# Altium PCB PCB1.PcbDoc
Units mil, origin at the board's own origin, x right, y up, seen from the top; angles counter-clockwise.
Board outline 3000 x 3150 mil, 4 copper layers (Top Layer 1, Power, Ground, Bottom Layer 1), stack 23.712 mil thick; 35 components, 32 nets, 142 pads, 10 vias.
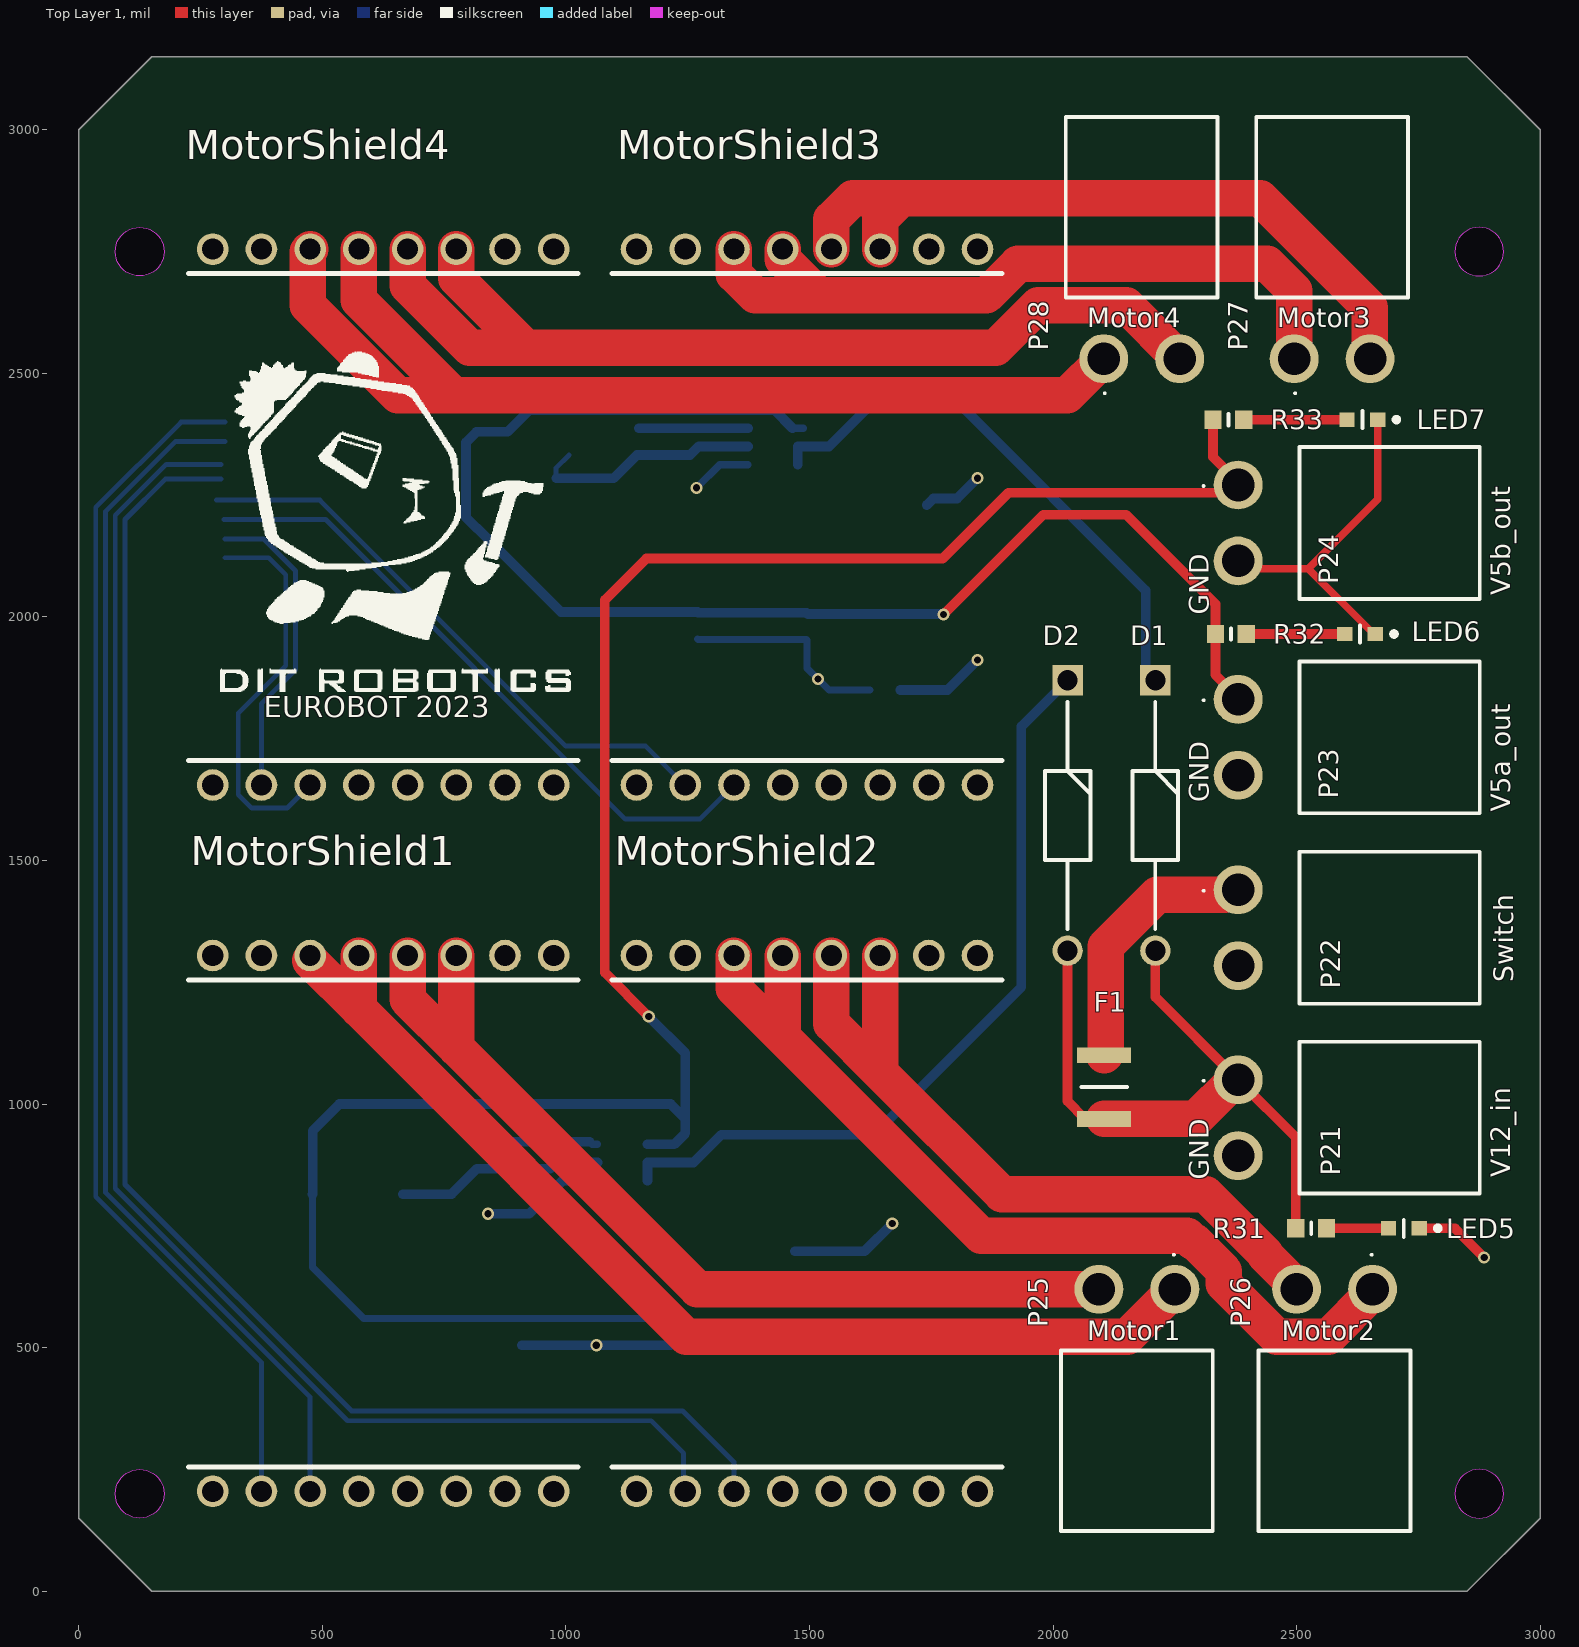
[diagram p0: Top Layer 1 view]
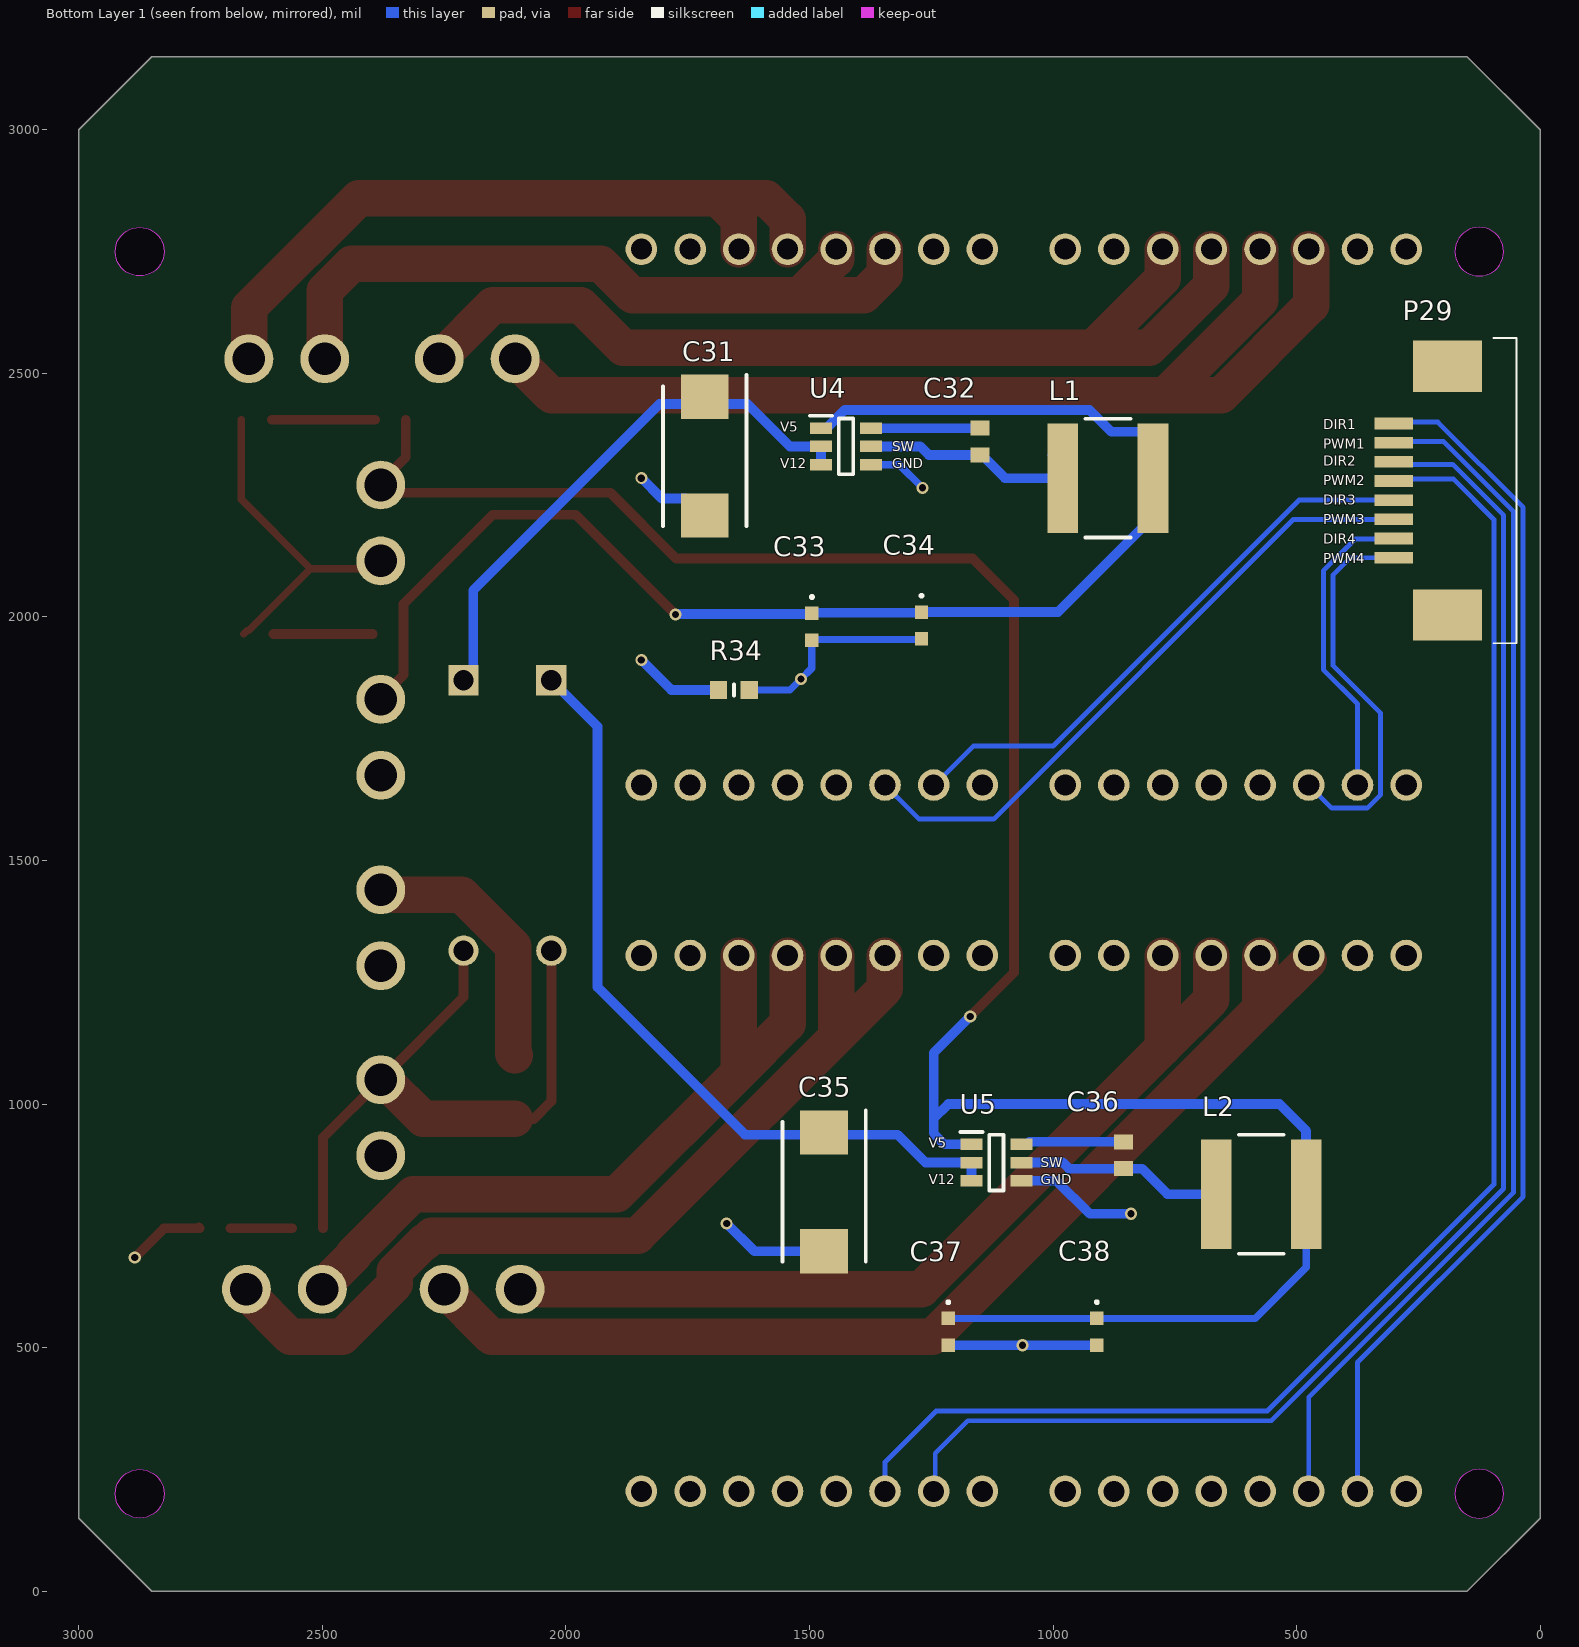
[diagram p1: Bottom Layer 1 view, seen from below]
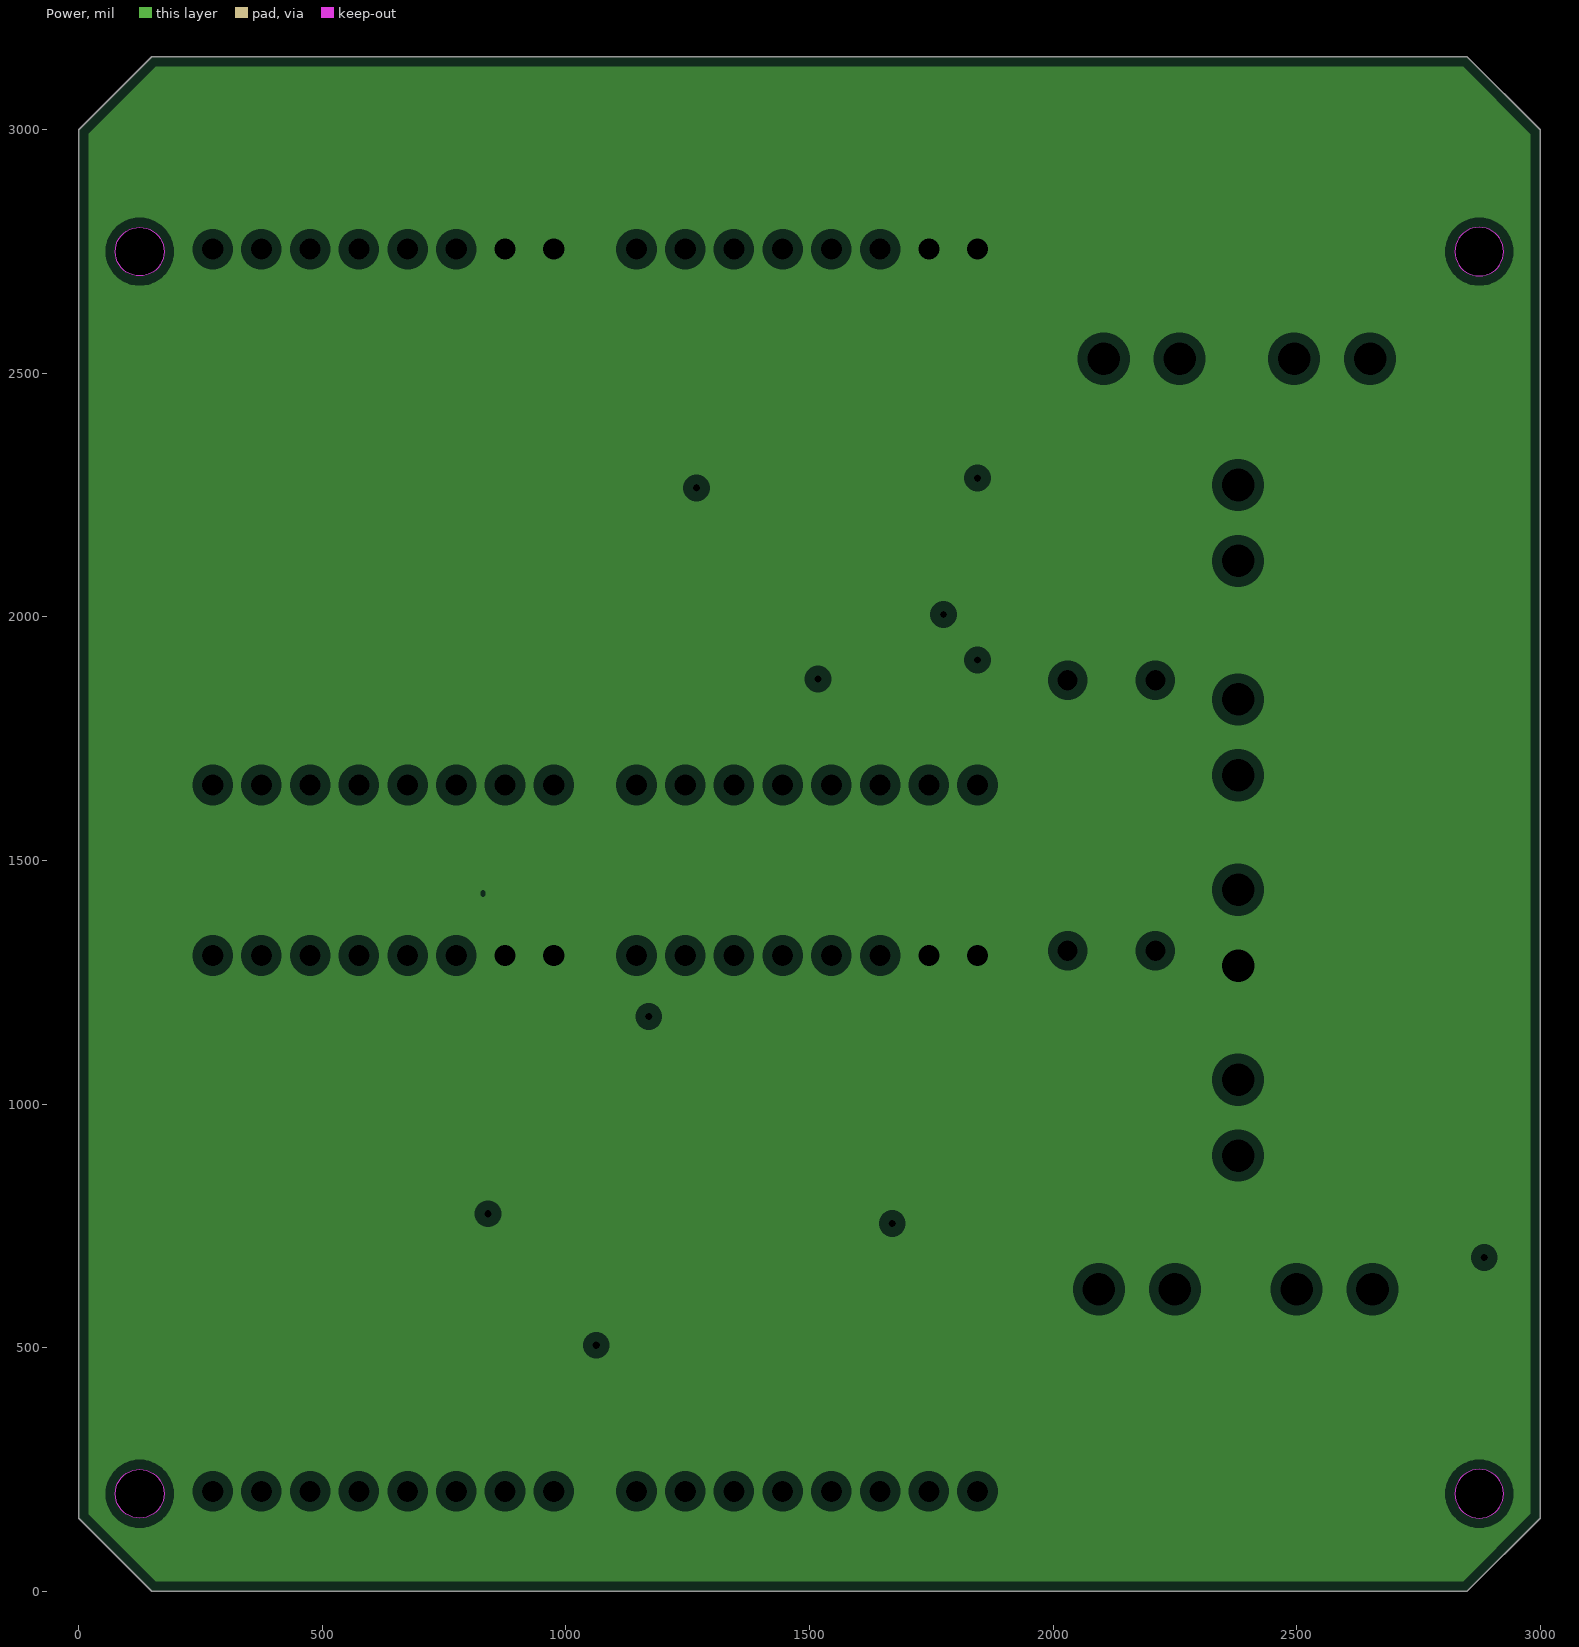
[diagram p2: Power, clearances drawn from the general rule]
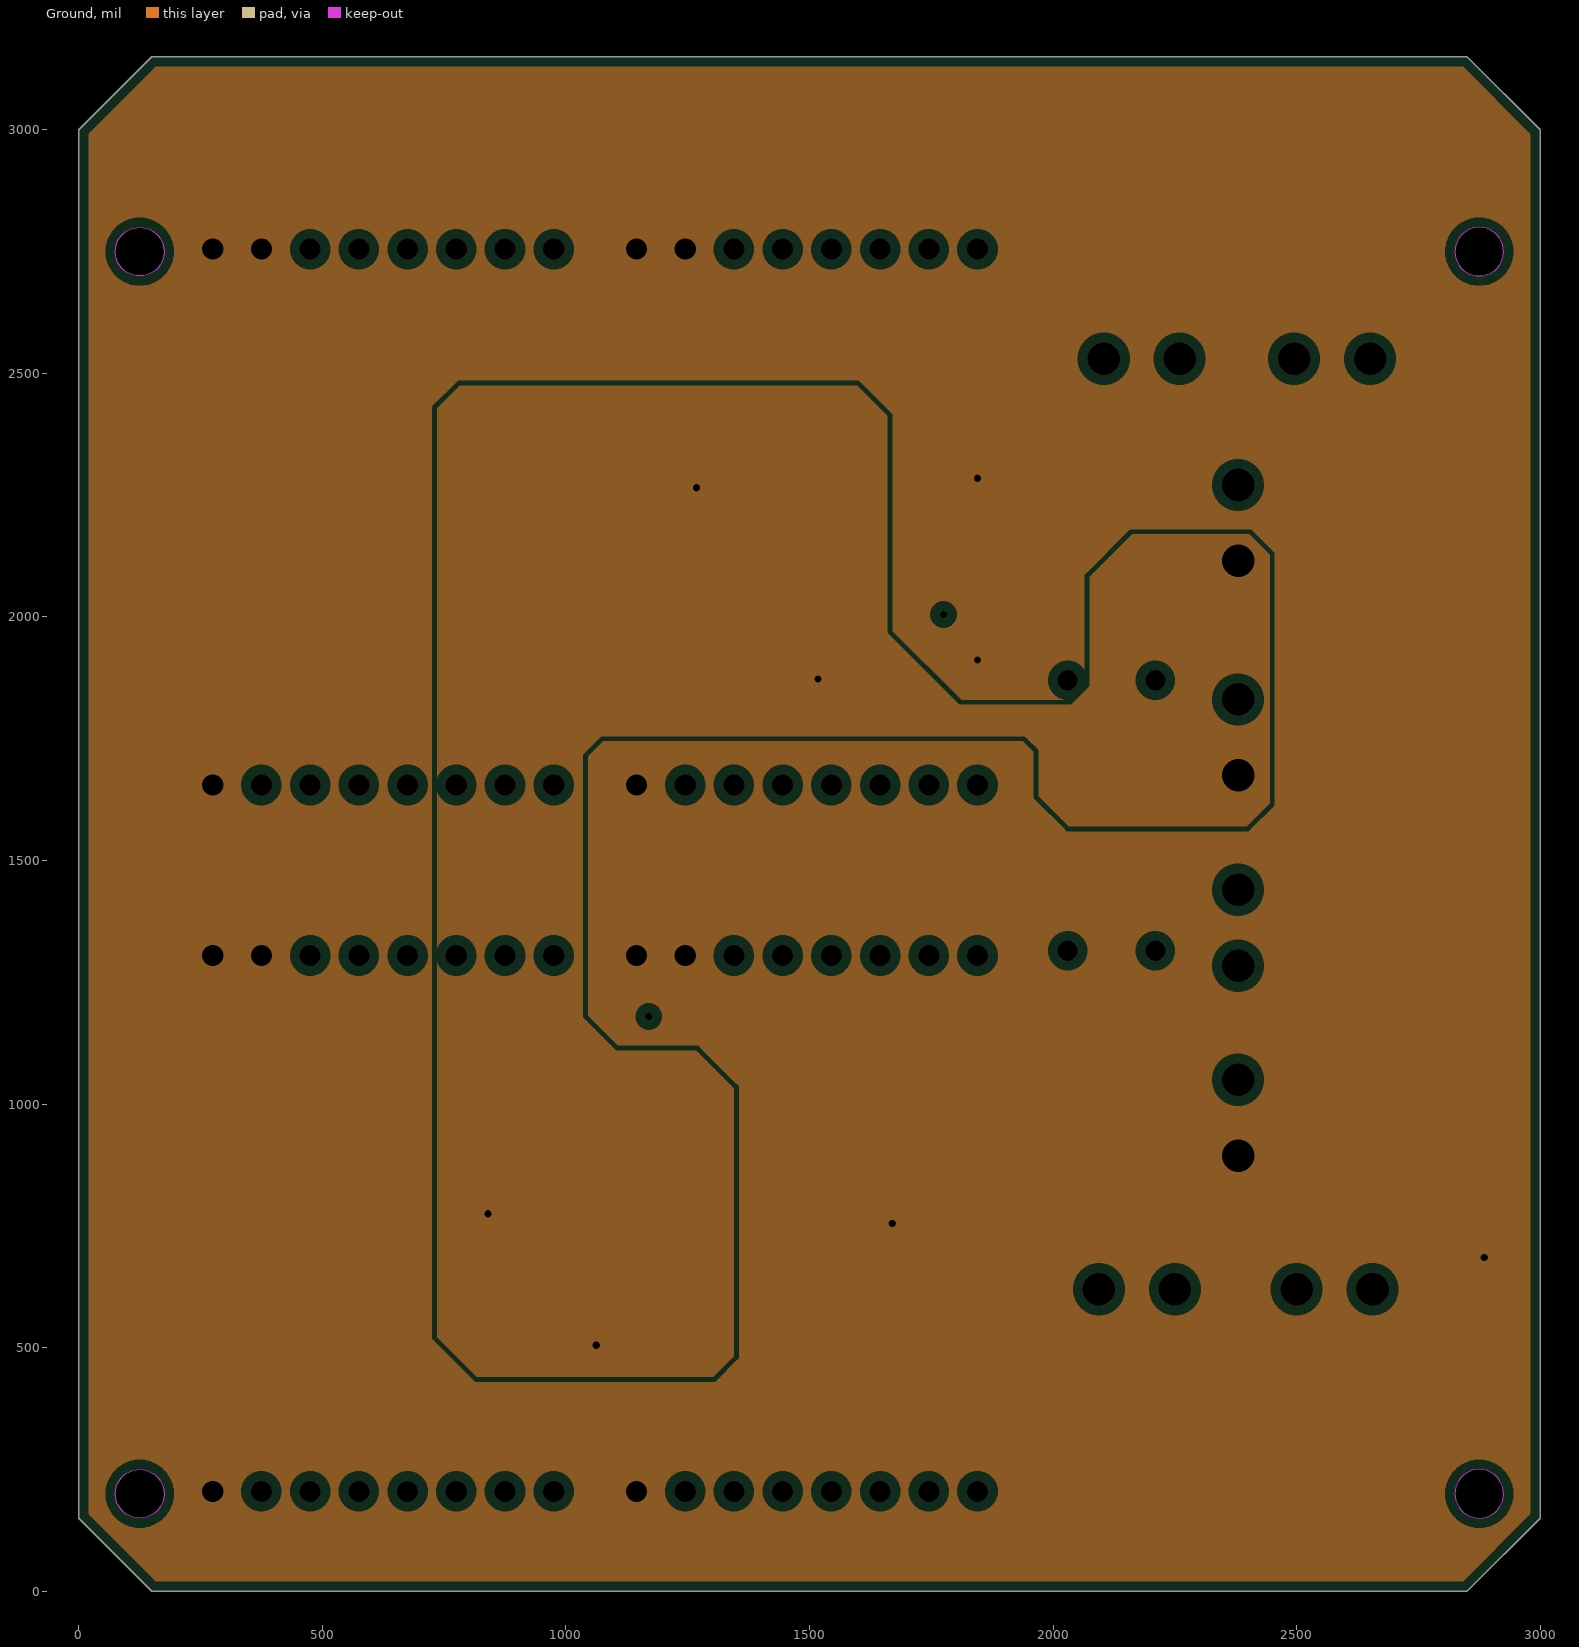
[diagram p3: Ground, clearances drawn from the general rule]
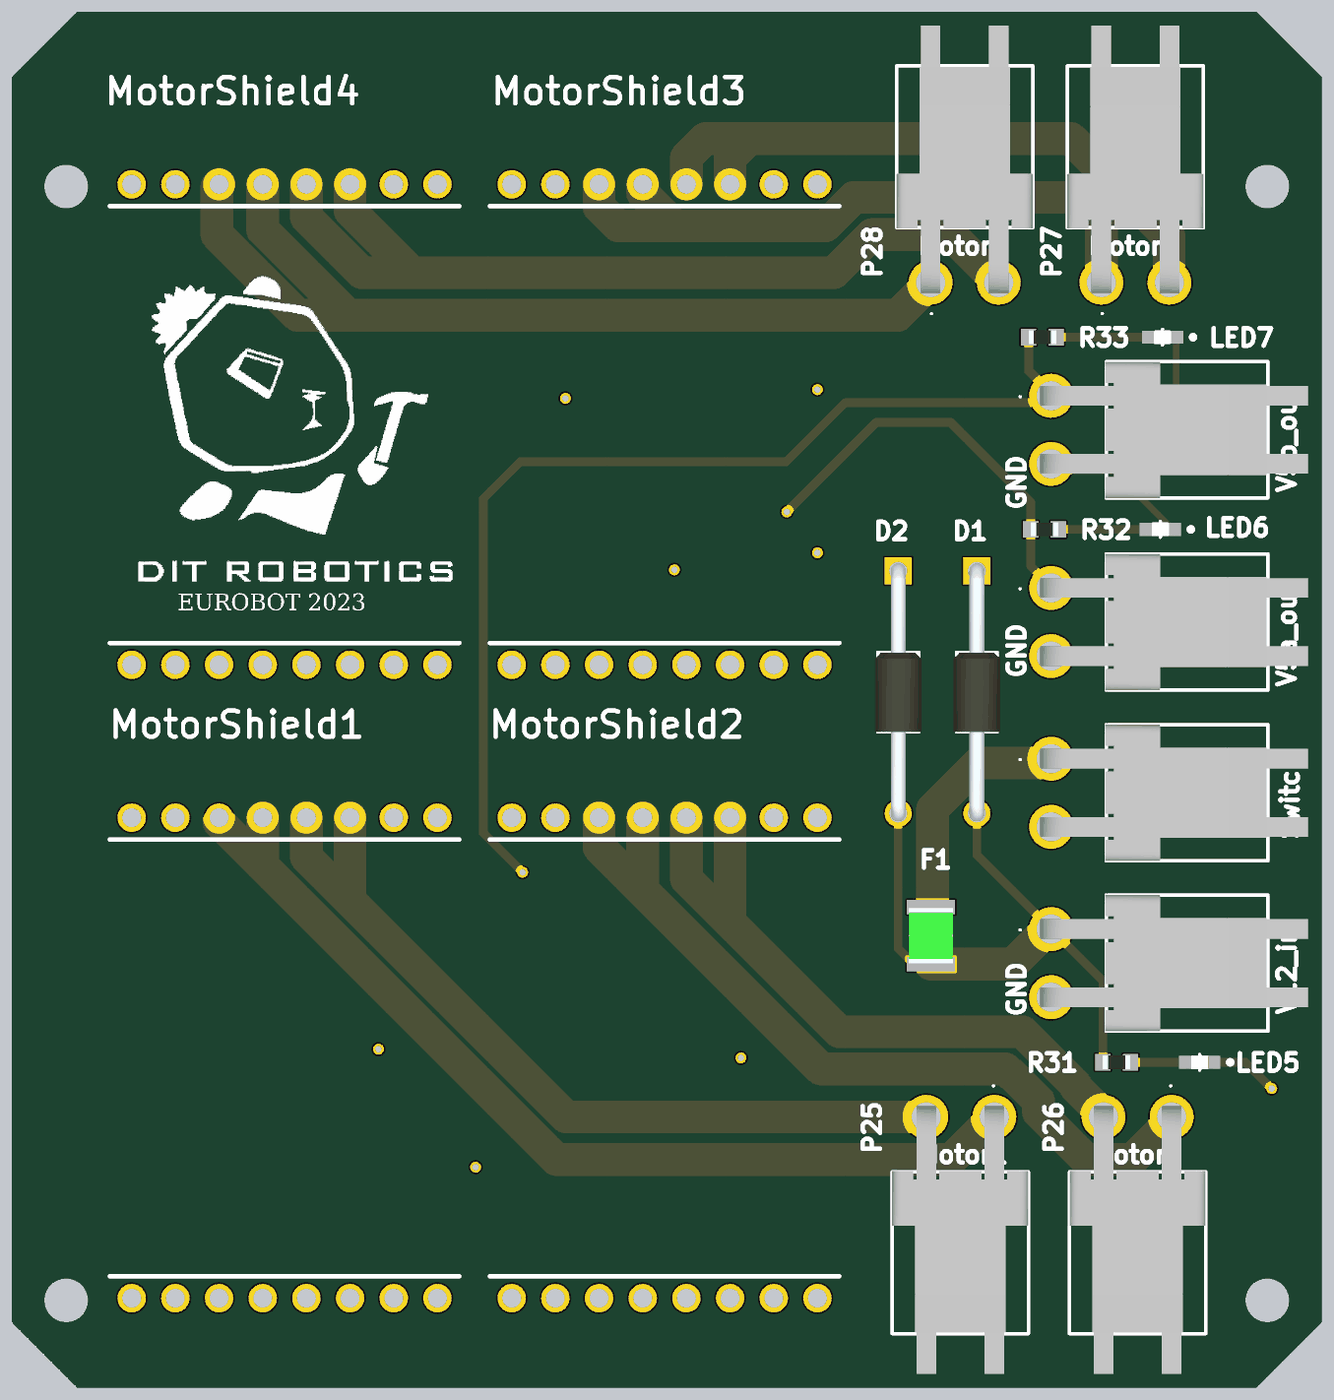
[diagram p4: 3D render of the assembled board from above, using the file's embedded part models]
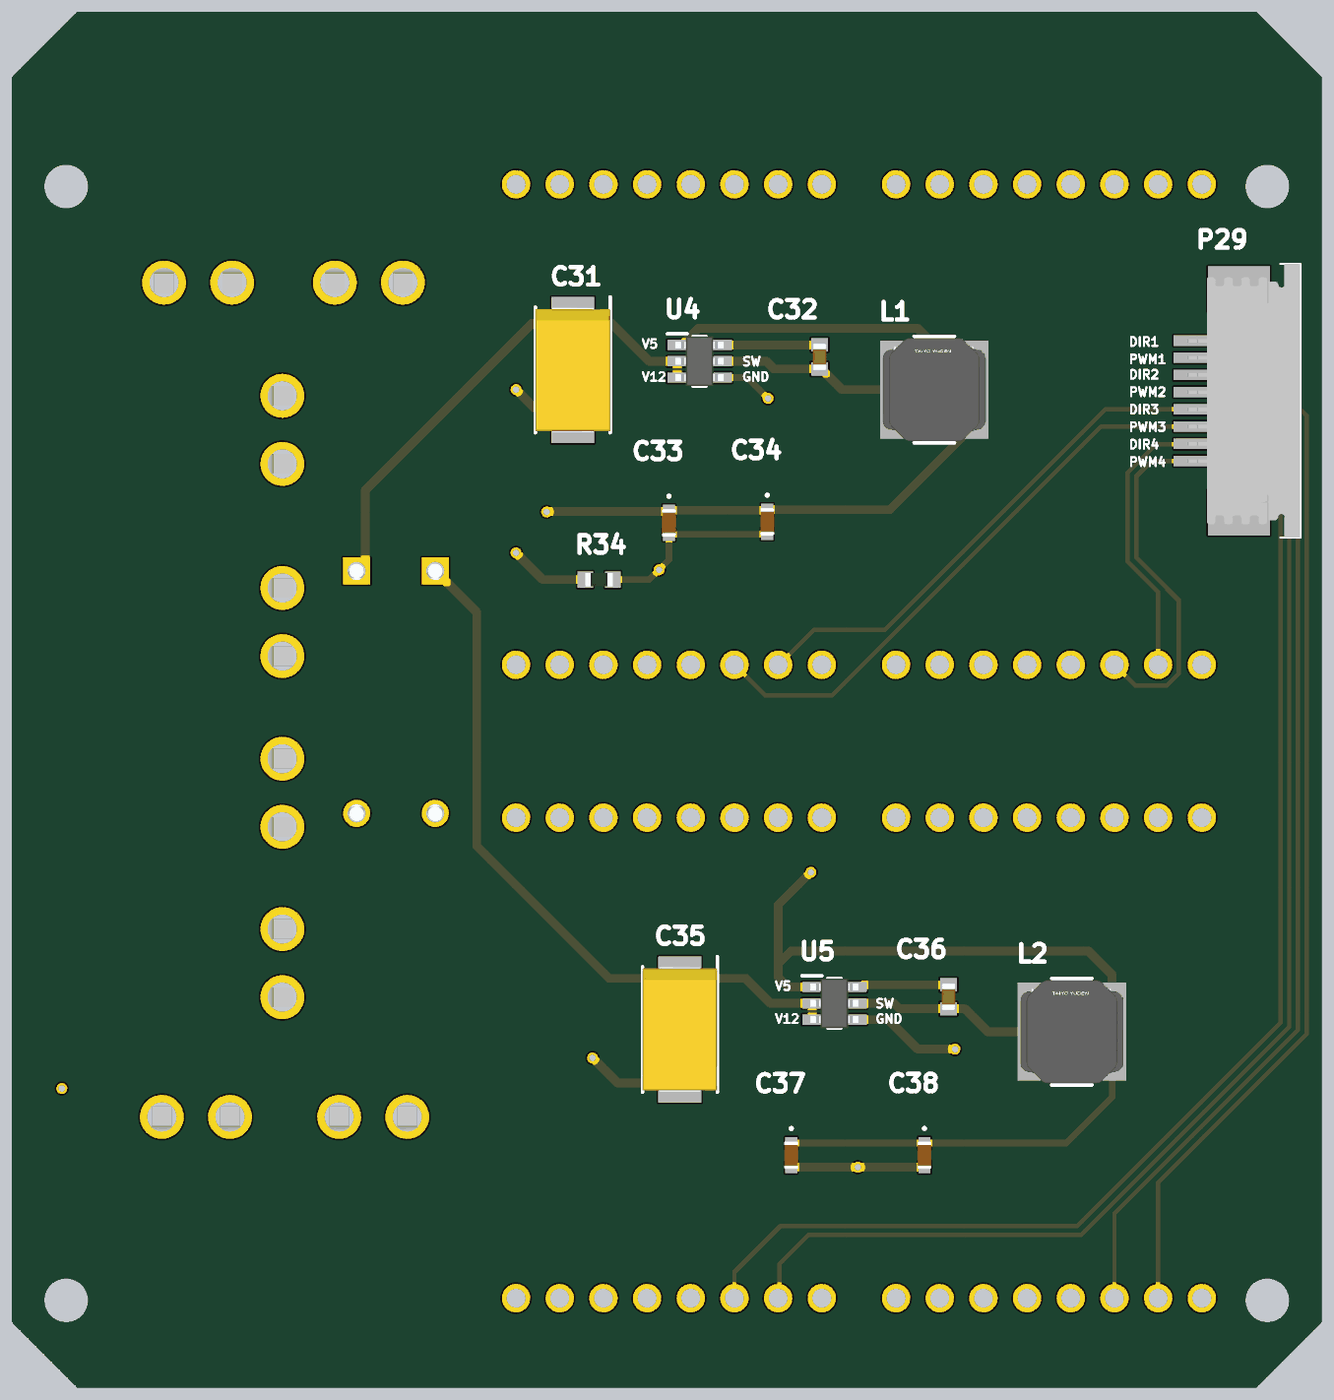
[diagram p5: 3D render of the assembled board from below, using the file's embedded part models]

## Layer stack, top to bottom
Top Solder: solder mask 0.4, Solder Resist, Dk 3.5
Top Layer 1: signal copper 1.378
Dielectric 2: prepreg 2.8, PP-006, Dk 4.1
Power: plane copper 1.378, net (Multiple Nets)
Dielectric 1: dielectric 12.6, FR-4, Dk 4.8
Ground: plane copper 1.378, net (Multiple Nets)
Dielectric 3: prepreg 2.8, PP-006, Dk 4.1
Bottom Layer 1: signal copper 1.378
Bottom Solder: solder mask 0.4, Solder Resist, Dk 3.5

## Board outline
150,0 0,150 0,3000 150,3150 2850,3150 3000,3000 3000,150 2850,0
cut-out: 125,150 cw(c125,200) 75,200 cw(c125,200) 125,250 cw(c125,200) 175,200 cw(c125,200)
cut-out: 2825,200 ccw(c2875,200) 2875,150 ccw(c2875,200) 2925,200 ccw(c2875,200) 2875,250 ccw(c2875,200)
cut-out: 2825,2750 ccw(c2875,2750) 2875,2700 ccw(c2875,2750) 2925,2750 ccw(c2875,2750) 2875,2800 ccw(c2875,2750)
cut-out: 125,2700 cw(c125,2750) 75,2750 cw(c125,2750) 125,2800 cw(c125,2750) 175,2750 cw(c125,2750)

## Design rules (kind name [scope] priority, off if disabled: settings)
Clearance [All] p1: gap=10 ignorepadtopadclearanceinfootprint=FALSE except(0: Arc-Hole Track-Hole SMDPad-Hole THPad-Hole Via-Hole Fill-Hole Poly-Hole Region-Hole Text-Hole)
PlaneClearance [All] p1: clearance=20
PlaneConnect [All] p1: planeconnectstyle=Relief reliefexpansion=20 reliefentries=4 reliefconductorwidth=10 reliefairgap=10
PolygonConnect [All] p1: connectstyle=Relief reliefconductorwidth=10 reliefentries=4 polygonreliefangle="90 Angle" airgapwidth=10
RoutingVias [All] p1: holewidth=15 width=25 viastyle="Through Hole" minholewidth=5 minwidth=15 maxholewidth=28 maxwidth=50
SolderMaskExpansion [All] p1: expansion=4 istentingtop=FALSE
Width [All] p1: maxlimit=100 minlimit=10 preferedwidth=20 minimp=50.000000 maximp=50.000000 favimp=50.000000
28 further rules are at their usual default settings.

## Classes and differential pairs
component class Power_board_2: MotorShield1 MotorShield2 MotorShield3 MotorShield4 P25 P26 P27 P28 P29
component class Power_board_1: C31 C32 C33 C34 C35 C36 C37 C38 D1 D2 F1 L1 L2 LED5 LED6 LED7 P21 P22 P23 P24 R31 R32 R33 R34 U4 U5

## Components (designator, comment, footprint, x,y, rotation, side; value= is the part's Value field where it differs from the comment)
C31 "100uF" CAPPM7344X310N 1715,2330 r270 bottom
C32 "0.1uF" CAPC1608X90N 1150,2360 r270 bottom
C33 "22uF" C1608_Commercial 1495,1980 r270 bottom
C34 "22uF" C1608_Commercial 1270,1982.44 r270 bottom
C35 "100uF" CAPPM7344X310N 1470,820 r270 bottom
C36 "0.1uF" CAPC1608X90N 855,895 r270 bottom
C37 "22uF" C1608_Commercial 1215,532.44 r270 bottom
C38 "22uF" C1608_Commercial 910,532.44 r270 bottom
D1 "1N4004" DIOAD1413W86L463D238 2210,1870 r270 top
D2 "1N4004" DIOAD1413W86L463D238 2030,1870 r270 top
F1 "MF-USML600_6-2" FUSC3226X120N 2105,1035 r90 top
L1 "4.7uH" FP-NR6028-MFG 887.48,2285 r180 bottom
L2 "4.7uH" FP-NR6028-MFG 572.48,815 r180 bottom
LED5 "150060RS55040" FP-150060RS55040-MFG 2720,745 r180 top
LED6 "150060RS55040" FP-150060RS55040-MFG 2630,1965 r180 top
LED7 "150060RS55040" FP-150060RS55040-MFG 2635,2405 r180 top
MotorShield1 "Pololu G2 18v17" "Pololu G218V17" 700,805 r90 top
MotorShield2 "Pololu G2 18v17" "Pololu G218V17" 1570,805 r90 top
MotorShield3 "Pololu G2 18v17" "Pololu G218V17" 1570,2255 r90 top
MotorShield4 "Pololu G2 18v17" "Pololu G218V17" 700,2255 r90 top
P21 "09-75-2024" 17444282 2380,1050 r270 top
P22 "09-75-2024" 17444282 2380,1440 r270 top
P23 "1744428-2" 17444282 2380,1830.91 r270 top
P24 "1744428-2" 17444282 2380,2270.91 r270 top
P25 "1744428-2" 17444282 2250,620 r180 top
P26 "1744428-2" 17444282 2655.91,620 r180 top
P27 "1744428-2" 17444282 2495,2530 r0 top
P28 "1744428-2" 17444282 2104.09,2530 r0 top
P29 "84952-8" 849528 174.25,2259.49 r90 bottom
R31 "1k" RESC1608X55N 2530,745 r0 top
R32 "1k" RESC1608X55N 2365,1965 r0 top
R33 "1k" RESC1608X55N 2360,2405 r0 top
R34 "0" RESC1608X55N 1655,1850 r0 bottom
U4 "AP63205WU-7" SOT95P280X100-6N 1425,2350 r180 bottom
U5 "AP63205WU-7" SOT95P280X100-6N 1116.18,880 r180 bottom

## Footprints (in the part's own frame and the unit in brackets; to place one, negate y for a bottom-side part, rotate by r counter-clockwise, add the part's x,y. Pads: shape width x height; smd on the part's side, far side on the other; paste and mask are expansions set on the pad)
849528 [mm]
  rect 0.61x2 smd: 1(-3.5,3.2) 2(-2.5,3.2) 3(-1.5,3.2) 4(-0.5,3.2) 5(0.5,3.2) 6(1.5,3.2) 7(2.5,3.2) 8(3.5,3.2)
  rect 2.68x3.6 smd: MP1(-6.49,0.4) MP2(6.49,0.4)
  silkscreen extent -7.96,-3.2 7.96,-2, body extent -7.97,-3.14 7.97,3.4, height 2.56
17444282 [mm]
  round 2.55 hole 1.7: 1(0,0) 2(3.96,0)
  silkscreen extent -1.98,-1.85 5.94,12.6, body extent -1.98,-0.63 5.94,14.94, height 9.26
C1608_Commercial [mm]
  rect 0.7x0.7 smd: 1(-0.7,0) 2(0.7,0)
  silkscreen extent -1.6,-0.05 -1.5,0.05, body extent -0.8,-0.4 0.8,0.4, height 0.8
CAPC1608X90N [mm]
  rect 0.78x0.99 smd: 1(-0.7,0) 2(0.7,0)
  body extent -0.8,-0.41 0.8,0.41, height 0.9
CAPPM7344X310N [mm]
  rect 2.3x2.5 smd: 1(-3.1,0) 2(3.1,0)
  silkscreen extent -4.25,-2.17 3.65,2.17, body extent -3.65,-2.17 3.65,2.17, height 3.1
DIOAD1413W86L463D238 [mm]
  rect 1.575x1.575 hole 1.05: 1(0,0)
  round 1.575 hole 1.05: 2(14.1,0)
  silkscreen extent 1.14,-1.19 12.96,1.19, body extent -0.43,-1.35 14.56,1.35, height 2.72
FP-150060RS55040-MFG [mm]
  rect 0.8x0.75 smd paste+0 mask+0: 1(-0.8,0) 2(0.8,0)
  silkscreen extent -1.9,-0.45 0,0.45, body extent -1.3,-0.55 1.3,0.55, height 0.25
FP-NR6028-MFG [mm]
  rect 1.6x5.7 smd paste+0 mask+0: 1(-2.35,0) 2(2.35,0)
  silkscreen extent -1.17,-3.1 1.17,3.1, body extent -3,-3 3,3, height 2.8
FUSC3226X120N [mm]
  rect 0.83x2.81 smd: 1(-1.66,0) 2(1.66,0)
  silkscreen extent 0,-1.19 0,1.19, body extent -1.61,-1.29 1.61,1.29, height 1.2
"Pololu G218V17" [mm]
  round 1.65 hole 1.1: 1(-15.24,10.795) 2(-15.24,8.255) 3(-15.24,5.715) 4(-15.24,3.175) 5(-15.24,0.635) 6(-15.24,-1.905) 7(-15.24,-4.445) 8(-15.24,-6.985) 9(12.7,10.795) 10(12.7,8.255) 11(12.7,5.715) 12(12.7,3.175) 13(12.7,0.635) 14(12.7,-1.905) 15(12.7,-4.445) 16(12.7,-6.985)
  silkscreen extent -13.97,-8.26 11.43,12.06
RESC1608X55N [mm]
  rect 0.9x0.95 smd: 1(-0.8,0) 2(0.8,0)
  silkscreen extent 0,-0.3 0,0.3, body extent -0.8,-0.4 0.8,0.4, height 0.55
SOT95P280X100-6N [mm]
  rect 1.15x0.6 smd: 1(-1.3,0.95) 2(-1.3,0) 3(-1.3,-0.95) 4(1.3,-0.95) 5(1.3,0) 6(1.3,0.95)
  silkscreen extent -1.88,-1.45 0.38,1.6, body extent -1.4,-1.45 1.4,1.45, height 1

## Part data
C31 C35: library part TAJD107K016RNJ, "Capacitor Polarised", Manufacturer_Name=AVX, Mouser Part Number=581-TAJD107K016R, Arrow Part Number=TAJD107K016RNJ, Arrow Price/Stock=https://www.arrow.com/en/products/tajd107k016rnj/avx, Datasheet Link=http://datasheets.avx.com/TAJ.pdf, Height=3.1mm, Manufacturer_Part_Number=TAJD107K016RNJ, Mouser Price/Stock=https://www.mouser.co.uk/ProductDetail/AVX/TAJD107K016RNJ?qs=srZBJ3srS4Aek4oWmPB2bw%3D%3D
C32 C36: library part GRM188R72A104MA35D, "Capacitor", Manufacturer_Name="Murata Electronics", Mouser Part Number=81-GRM188R72A104MA5D, Arrow Part Number=GRM188R72A104MA35D, Arrow Price/Stock=https://www.arrow.com/en/products/grm188r72a104ma35d/murata-manufacturing?region=nac, Height=0.9mm, Manufacturer_Part_Number=GRM188R72A104MA35D, Mouser Price/Stock=https://www.mouser.co.uk/ProductDetail/Murata-Electronics/GRM188R72A104MA35D?qs=QdePRyQsNGaEtttrWFG%2FPQ%3D%3D
C33 C34 C37 C38: library part C1608X5R1H104M080AA, "Capacitor", Manufacturer_Name=TDK, Datasheet Link=https://product.tdk.com/system/files/dam/doc/product/capacitor/ceramic/mlcc/catalog/mlcc_commercial_general_en.pdf, Height=0.9mm, Manufacturer_Part_Number=C1608X5R1H104M080AA
D1 D2: "Diode", Manufacturer_Name=onsemi, Mouser Part Number=863-1N4004, Arrow Part Number=1N4004, Arrow Price/Stock=https://www.arrow.com/en/products/1n4004/on-semiconductor, Datasheet Link=https://datasheet.datasheetarchive.com/originals/distributors/Datasheets-24/DSA-461675.pdf, Manufacturer_Part_Number=1N4004, Mouser Price/Stock=http://www.mouser.com/Search/ProductDetail.aspx?qs=y2kkmE52mdNwTMdxP3IlZA%3d%3d
F1: "Fuse", Manufacturer_Name=Bourns, Manufacturer_Part_Number=MF-USML600/6-2, Mouser Part Number=652-MF-USML600/6-2, Datasheet Link=https://www.bourns.com/docs/product-datasheets/mf-usml.pdf?sfvrsn=75cb6af6_18, Height=1.2mm, Mouser Price/Stock=https://www.mouser.com/Search/Refine.aspx?Keyword=652-MF-USML600%2F6-2
L1 L2: library part CMP-14484-000746-1, "SMD Power Inductors for Automotive Applications 4.7uH ±20% 2.7A 40.3mΩ", Case/Package=Nonstandard, Current Rating=3A, DC Resistance (DCR)=40.3mR, Max Operating Temperature=125°C, Min Operating Temperature=-25°C, Package Quantity=2000, Ratings=AEC-Q200, Resistor Type=Wirewound, Saturation Current=2.7A, Self Resonant Frequency=39MHz, Test Frequency=100kHz, Tolerance=20%, Core Material=Ferrite, Depth=6mm, Halogen Free="Halogen Free", Height=2.8mm, Height - Seated (Max)=0.11inch, Inductance=4.7uH, Length=0.236inch, Max DC Current=3A, Mount="Surface Mount", Packaging="Tape and Reel", Radiation Hardening=No, RoHS Compliant=Yes, Shielding=Shielded, Termination=SMD/SMT, Width=6mm
LED5 LED6 LED7: library part CMP-207942-000007-1, "LED RED DIFFUSED 0603 SMD", Case Code (Imperial)=0603, Case Code (Metric)=1608, Color=Red, Forward Voltage=2V, Test Current=20mA, Case/Package=0603, Dominant Wavelength=624nm, Height=0.5mm, Length=1.6mm, Lens Size=0.8mm, Lens Style=Flat, Lens Transparency=Diffused, Luminous Intensity=90mcd, Mount="Surface Mount", Packaging="Cut Tape", RoHS Compliant=No, Viewing Angle=140°, Width=0.8mm
MotorShield1 MotorShield2 MotorShield3 MotorShield4: "DC Motor Driver"
P21 P22: library part 1744428-2, "Connector", Manufacturer_Name="TE Connectivity", Mouser Part Number=571-1744428-2, Datasheet Link=https://www.te.com/commerce/DocumentDelivery/DDEController?Action=srchrtrv&DocNm=1744428&DocType=Customer+Drawing&DocLang=English, Height=8.8mm, Manufacturer_Part_Number=1744428-2, Mouser Price/Stock=https://www.mouser.co.uk/ProductDetail/TE-Connectivity/1744428-2?qs=%2F6W%2F9%2FHWvcDoOfykajFB2Q%3D%3D
P23 P24 P25 P26 P27 P28: "Connector", Manufacturer_Name="TE Connectivity", Mouser Part Number=571-1744428-2, Datasheet Link=https://www.te.com/commerce/DocumentDelivery/DDEController?Action=srchrtrv&DocNm=1744428&DocType=Customer+Drawing&DocLang=English, Height=8.8mm, Manufacturer_Part_Number=1744428-2, Mouser Price/Stock=https://www.mouser.co.uk/ProductDetail/TE-Connectivity/1744428-2?qs=%2F6W%2F9%2FHWvcDoOfykajFB2Q%3D%3D
P29: "Connector", Manufacturer_Name="TE Connectivity", Mouser Part Number=571-84952-8, Arrow Part Number=84952-8, Arrow Price/Stock=https://www.arrow.com/en/products/84952-8/te-connectivity?region=europe, Datasheet Link=https://www.te.com/commerce/DocumentDelivery/DDEController?Action=showdoc&DocId=Customer+Drawing%7F84952%7FA4%7Fpdf%7FEnglish%7FENG_CD_84952_A4.pdf%7F84952-8, Height=2.74mm, Manufacturer_Part_Number=84952-8, Mouser Price/Stock=https://www.mouser.co.uk/ProductDetail/TE-Connectivity/84952-8?qs=uUkeXfjQ8uTKEYAHE0dNDQ%3D%3D
R31 R32 R33 R34: library part CMP0603-FX-1003ELF, "Resistor", Manufacturer_Name=Bourns, Datasheet Link=https://www.mouser.co.uk/datasheet/2/54/Bourns_CMP_Datasheet_05.28.20-1854233.pdf, Height=0.55mm, Manufacturer_Part_Number=CMP0603-FX-1003ELF
U4 U5: "Integrated Circuit", Manufacturer_Name="Diodes Inc.", Mouser Part Number=621-AP63205WU-7, Arrow Part Number=AP63205WU-7, Arrow Price/Stock=https://www.arrow.com/en/products/ap63205wu-7/diodes-incorporated?region=nac, Datasheet Link=https://www.diodes.com/assets/Datasheets/AP63200-AP63201-AP63203-AP63205.pdf, Height=1mm, Manufacturer_Part_Number=AP63205WU-7, Mouser Price/Stock=https://www.mouser.co.uk/ProductDetail/Diodes-Incorporated/AP63205WU-7?qs=u16ybLDytRZtkj8PzdWCOw%3D%3D

## Via types
v1: diameter 25, hole 15, Top Layer 1 to Bottom Layer 1, 10 vias

## Nets (pads, with @x,y where several pads share a name; then routed paths per layer and width w, separated by ;. In a path a pad name is that pad's centre, name@x,y a point inside that pad or via, vN(x,y) a via of type N, cw(c..) or ccw(c..) an arc to the next point about the centre after c; other vN are vias at no path point)
GND: C33.2 C34.2 C37.2 C38.2 LED6.1 LED7.1 P23.2 P24.2 R34.1 U4.4 U5.4 | length 1816
  Top Layer 1 w15: P24.2@2380,2099.09 2524.09,2099.09 ; LED6.1 2654.23,1972.26 2650.93,1972.26 2524.09,2099.09 ; LED7.1 2666.5,2241.5 2524.09,2099.09
  Bottom Layer 1 w15: v1(1268.04,2265) 1315.64,2312.6 U4.4 ; C34.2 1271.22,1953.66 1493.78,1953.66 C33.2 1495,1895 v1(1517.5,1872.5) 1540,1850 R34.1
  Bottom Layer 1 w20: v1(840,775) 924.88,775 992.48,842.6 U5.4 ; C38.2 v1(1062.5,504.88) C37.2
NetC31_1: C31.1 D1.1 U4.2 U4.3 | length 1139
  Bottom Layer 1 w20: U4.3 U4.2 1540,2350 1627.24,2437.24 1650,2437.24 1807.76,2437.24 2190.28,2054.72 2190.28,1889.72 D1.1
NetC32_1: C32.1 U4.6 | length 223.9
  Bottom Layer 1 w10: C32.1 C32.1@1150.16,2387.4
  Bottom Layer 1 w20: C32.1@1150.16,2387.4 U4.6
NetC32_2: C32.2 L1.1 U4.5 | length 479.2
  Bottom Layer 1 w10: L1.1 980,2305.94 L1.1@1006.5,2332.44
  Bottom Layer 1 w15: C32.2@1145.87,2332.44 C32.2
  Bottom Layer 1 w20: L1.1 1098.43,2285 C32.2@1145.87,2332.44 ; C32.2 1254.96,2332.44 1272.52,2350 U4.5
NetC35_1: C35.1 D2.1 U5.2 U5.3 | length 1623.5
  Bottom Layer 1 w20: U5.3 U5.2 1261.99,880 1319.23,937.24 1470,937.24 1632.24,937.24 1935,1240 1935,1775 D2.1
NetC36_1: C36.1 U5.6 | length 212.1
  Bottom Layer 1 w15: U5.6@1049.02,922.56 1054.17,917.4 U5.6
  Bottom Layer 1 w20: C36.1 U5.6@1049.02,922.56
NetC36_2: C36.2 L2.1 U5.5 | length 426.9
  Bottom Layer 1 w20: L2.1 765,815 817.44,867.44 C36.2 967.44,867.44 980,880 U5.5
NetF1_2: F1.2 P22.1 | length 544.9
  Top Layer 1 w75: F1.2 2108.5,1103.86 2108.5,1324.41 2214.1,1430 2352.04,1430 2357.19,1435.14 2375.14,1435.14 P22.1
NetLED5_2: LED5.2 R31.2 | length 126.8
  Top Layer 1 w20: R31.2 LED5.2@2688.27,745
NetLED6_2: LED6.2 R32.2 | length 203.8
  Top Layer 1 w20: R32.2 LED6.2@2600.25,1965
NetLED7_2: LED7.2 R33.2 | length 212
  Top Layer 1 w20: R33.2 LED7.2
NetMotorShield1_2: MotorShield1.2 P29.8 | length 2498.6
  Bottom Layer 1 w10: P29.8@300.24,2400 210,2400 35,2225 35,810.15 375,470.15 MotorShield1.2
NetMotorShield1_3: MotorShield1.3 P29.7 | length 2490.3
  Bottom Layer 1 w10: P29.7@300.24,2360 198.28,2360 55,2216.72 55,818.43 475,398.43 MotorShield1.3
NetMotorShield1_11: MotorShield1.11 MotorShield1.12 P25.1 | length 2255.9
  Top Layer 1 w10: MotorShield1.11@475,1294.79 MotorShield1.11
  Top Layer 1 w75: MotorShield1.11@475,1294.79 575,1194.79 ; MotorShield1.12 575,1194.79 ; P25.1 2152.3,522.3 1247.49,522.3 575,1194.79
NetMotorShield1_13: MotorShield1.13 MotorShield1.14 P25.2 | length 1945.6
  Top Layer 1 w75: MotorShield1.13 675,1215 775,1115 ; MotorShield1.14 775,1115 ; P25.2 1270,620 775,1115
NetMotorShield2_2: MotorShield2.2 P29.6 | length 3139.4
  Bottom Layer 1 w10: P29.6@292.18,2313.09 179.66,2313.09 75,2208.43 75,826.72 551.72,350 1175,350 1241.72,283.28 MotorShield2.2@1241.72,177.98
NetMotorShield2_3: MotorShield2.3 P29.5 | length 3142.7
  Bottom Layer 1 w10: P29.5@291.95,2283.44 178.29,2283.44 95,2200.15 95,835 560,370 1240,370 1345,265 MotorShield2.3
NetMotorShield2_11: MotorShield2.11 MotorShield2.12 P26.1 | length 1902.1
  Top Layer 1 w75: MotorShield2.11 1345,1237.5 1852.5,730 2275,730 2287.3,717.7 2290.47,717.7 2350.91,657.26 2350.91,630.93 2459.53,522.3 2565.08,522.3 2655.91,613.13 P26.1 ; 1445,1137.5 MotorShield2.12
NetMotorShield2_13: MotorShield2.13 MotorShield2.14 P26.2 | length 1565.3
  Top Layer 1 w75: MotorShield2.13 1545,1165.21 1645,1065.21 ; MotorShield2.14 1645,1065.21 ; P26.2 2500,625.21 2435.91,689.3 2435.91,692.47 2313.37,815 1895.21,815 1645,1065.21
NetMotorShield3_2: MotorShield3.2 P29.4 | length 1205
  Bottom Layer 1 w10: P29.4@282.89,2240 495,2240 1000,1735 1163.57,1735 MotorShield3.2@1245,1653.57
NetMotorShield3_3: MotorShield3.3 P29.3 | length 1358.7
  Bottom Layer 1 w10: P29.3@297.72,2200 506.72,2200 1121.72,1585 1275,1585 MotorShield3.3@1364.6,1674.6
NetMotorShield3_11: MotorShield3.11 MotorShield3.12 P27.1 | length 1518.7
  Top Layer 1 w75: MotorShield3.11 1345,2703.93 1388.93,2660 1475,2660 ; MotorShield3.12 1445,2734.79 1509.79,2670 1504.84,2667.5 ; 1482.5,2660 1863.11,2660 1928.11,2725 2439.79,2725 2495,2669.79 P27.1
NetMotorShield3_13: MotorShield3.13 MotorShield3.14 P27.2 | length 1505.7
  Top Layer 1 w75: MotorShield3.13 1545,2816.07 1588.93,2860 1688.93,2860 ; MotorShield3.14 1645,2816.07 1688.93,2860 ; P27.2@2650,2530 2650,2635 2425,2860 1688.93,2860
NetMotorShield4_2: MotorShield4.2 P29.2 | length 641.1
  Bottom Layer 1 w10: P29.2@299.84,2160 380,2160 445,2095 445,1891.83 375,1821.83 MotorShield4.2
NetMotorShield4_3: MotorShield4.3 P29.1 | length 809.7
  Bottom Layer 1 w10: P29.1 390.02,2121.69 425,2086.72 425,1900.12 355,1830.12 355,1830 327.52,1802.52 327.52,1635.33 355.33,1607.52 427.52,1607.52 MotorShield4.3
NetMotorShield4_11: MotorShield4.11 MotorShield4.12 P28.1 | length 2239.6
  Top Layer 1 w75: MotorShield4.11 470,2750 470,2640 655,2455 770,2455 ; MotorShield4.12 575,2650 770,2455 ; P28.1 2029.09,2455 770,2455
NetMotorShield4_13: MotorShield4.13 MotorShield4.14 P28.2 | length 2055.7
  Top Layer 1 w75: MotorShield4.13 675,2680 802.3,2552.7 917.3,2552.7 ; MotorShield4.14 775,2695 917.3,2552.7 ; P28.2 2150,2640 1970,2640 1882.7,2552.7 917.3,2552.7
PGND1: C31.2 C35.2 LED5.1 MotorShield1.1 MotorShield1.9 MotorShield1.10 MotorShield2.1 MotorShield2.9 MotorShield2.10 MotorShield3.1 MotorShield3.9 MotorShield3.10 MotorShield4.1 MotorShield4.9 MotorShield4.10 P21.2 R34.2 | length 695.7
  Top Layer 1 w20: LED5.1@2753.54,747.05 LED5.1 2825,745 v1(2885,685)
  Bottom Layer 1 w20: C35.2 1612.95,697.95 v1(1670,755) ; R34.2 1783.5,1850 v1(1845,1911.5) ; C31.2@1740.98,2230 1754.21,2243.23 1803.23,2243.23 v1(1845,2285)
V5a: C33.1 C34.1 L1.2 P23.1 R32.1 U4.1 | length 2891
  Top Layer 1 w15: P23.1@2352.05,1817.95 P23.1@2355,1820.91
  Top Layer 1 w20: v1(1775,2005) 1980,2210 2150,2210 2333.5,2026.5 2333.5,1955 2333.5,1881.26 2380,1834.76 P23.1
  Bottom Layer 1 w15: C34.1 C34.1@1271.22,2008.78 ; U4.1@1465.35,2387.4 U4.1 U4.1@1487.6,2387.4 ; C33.1@1493.78,2008.78 C33.1 C33.1@1496.28,2006.28 ; v1@1773.72,2006.28 v1(1775,2005)
  Bottom Layer 1 w20: C34.1 990,2010 817.2,2182.8 816.46,2182.8 794.96,2204.29 L1.2 794.96,2358.5 816.46,2380 880,2380 925,2425 1427.76,2425 U4.1@1465.35,2387.4 ; C34.1@1271.22,2008.78 C33.1@1493.78,2008.78 ; C33.1@1496.28,2006.28 v1@1773.72,2006.28
V5b: C37.1 C38.1 L2.2 P24.1 R33.1 U5.1 | length 4671.5
  Top Layer 1 w20: v1(1170,1180) 1080,1270 1080,2035 1165,2120 1773.64,2120 1908.64,2255 2380,2255 2380,2276.75 2328.5,2328.25 R33.1
  Bottom Layer 1 w15: L2.2 479.96,665.04 585,560 C38.1 C37.1
  Bottom Layer 1 w20: L2.2 480.49,815.53 480.49,945.49 535,1000 1215,1000 1245,970 ; U5.1 1222.4,917.4 1245,940 1245,970 ; v1(1170,1180) 1245,1105 1245,970
V12a: D1.2 D2.2 F1.1 P21.1 R31.1 | length 1397.1
  Top Layer 1 w20: D2.2 2029.68,1314.57 2029.68,1005.98 2066.02,969.65 F1.1 ; D1.2 2210,1220 P21.1 2498.5,931.5 R31.1
  Top Layer 1 w75: F1.1 2292.77,969.65 2373.13,1050 P21.1
VM: MotorShield1.15 MotorShield1.16 MotorShield2.15 MotorShield2.16 MotorShield3.15 MotorShield3.16 MotorShield4.15 MotorShield4.16 P22.2
pads on no net: MotorShield1.4 MotorShield1.5 MotorShield1.6 MotorShield1.7 MotorShield1.8 MotorShield2.4 MotorShield2.5 MotorShield2.6 MotorShield2.7 MotorShield2.8 MotorShield3.4 MotorShield3.5 MotorShield3.6 MotorShield3.7 MotorShield3.8 MotorShield4.4 MotorShield4.5 MotorShield4.6 MotorShield4.7 MotorShield4.8 P29.MP1 P29.MP2

## Polygon pours and split planes (outlines as drawn)
VM on Power (split plane): 2979.9,2991.68 2979.9,158.32 2841.68,20.1 158.32,20.1 20.1,158.32 20.1,2991.68 158.32,3129.9 2841.68,3129.9
GND on Ground (split plane): 1659.9,2412.89 1659.9,1970 1660.29,1968.05 1661.4,1966.4 1806.4,1821.4 1808.05,1820.29 1810,1819.9 2035,1819.9 2036.95,1820.29 2038.6,1821.4 2073.6,1856.4 2074.71,1858.05 2075.1,1860 2075.1,2082.89 2162.11,2169.9 2402.89,2169.9 2444.9,2127.89 2444.9,1617.11 2397.89,1570.1 2032.11,1570.1 1970.1,1632.11 1970.1,1725 1969.71,1726.95 1968.6,1728.6 1943.6,1753.6 1941.95,1754.71 1940,1755.1 1075,1755.1 1073.05,1754.71 1071.4,1753.6 1036.4,1718.6 1035.29,1716.95 1034.9,1715 1034.9,1180 1035.29,1178.05 1036.4,1176.4 1101.4,1111.4 1103.05,1110.29 1105,1109.9 1267.89,1109.9 1344.9,1032.89 1344.9,482.11 1302.89,440.1 817.11,440.1 735.1,522.11 735.1,2427.89 782.11,2474.9 1597.89,2474.9
PGND1 on Ground (split plane): 2979.9,2991.68 2979.9,158.32 2841.68,20.1 158.32,20.1 20.1,158.32 20.1,2991.68 158.32,3129.9 2841.68,3129.9

## Other copper
Power (plane layer: these items are gaps in the copper):
  lines w10: 830,1430 830,1435
Ground (plane layer: these items are gaps in the copper):
  lines w10: 730,520 815,435 1305,435 1350,480 1350,1035 1270,1115 1105,1115 1040,1180 1040,1715 1075,1750 1940,1750 1965,1725 1965,1630 2030,1565 2340,1565 2400,1565 2450,1615 2450,2130 2405,2175 2160,2175 2070,2085 2070,1860 2035,1825 1810,1825 1665,1970 1665,2415 1600,2480 1540,2480 780,2480 730,2430 730,520

## Silkscreen, mask and mechanical layers (free items; w line width, h text height)
Top Overlay:
  drawing of 20 lines, arcs and shapes, not listed
  text "Motor4" at 2070,2595 h40
  text "Motor3" at 2460,2595 h40
  text "V5b_out" at 2938.34,2045 h40 r90
  text "GND" at 2320,2005 h40 r90
  text "EUROBOT 2023" at 380,1780 h75
  text "GND" at 2320,1620 h40 r90
  text "V5a_out" at 2938.34,1600 h40 r90
  text "Switch" at 2945,1250 h40 r90
  text "V12_in" at 2938.34,850 h40 r90
  text "GND" at 2320,845 h40 r90
  text "Motor1" at 2070,515 h40
  text "Motor2" at 2470,515 h40
Bottom Overlay:
  text "DIR1" at 445,2385 h20
  text "V5" at 1560,2380 h20
  text "PWM1" at 445,2345 h20
  text "SW" at 1330,2340 h20
  text "DIR2" at 445,2310 h20
  text "GND" at 1330,2305 h20
  text "V12" at 1560,2305 h20
  text "PWM2" at 445,2270 h20
  text "DIR3" at 445,2230 h20
  text "PWM3" at 445,2190 h20
  text "DIR4" at 445,2150 h20
  text "PWM4" at 445,2110 h20
  text "V5" at 1255,910 h20
  text "SW" at 1025,870 h20
  text "GND" at 1025,835 h20
  text "V12" at 1255,835 h20
Mechanical 1:
  circle w10: c2875,200 r50
  circle w10: c2875,2750 r50
  circle w10: c125,200 r50
  circle w10: c125,2750 r50
  lines w30: 0,150 0,3000 150,3150 2850,3150 3000,3000 3000,150 2850,0 150,0 0,150

## Dimensions
0,3390 to 3000,3380 on Mechanical 1
3320,0 to 3430,3150 on Mechanical 1